# Altium PCB FPGA_Interface_BRD.PcbDoc (part 2 of 2)
Units mm, origin at the board's own origin, x right, y up, seen from the top; angles counter-clockwise.
Board outline 100 x 93 mm, 4 copper layers (L1, L2, L3, L4), stack 1.57 mm thick; 92 components, 85 nets, 379 pads, 103 vias.
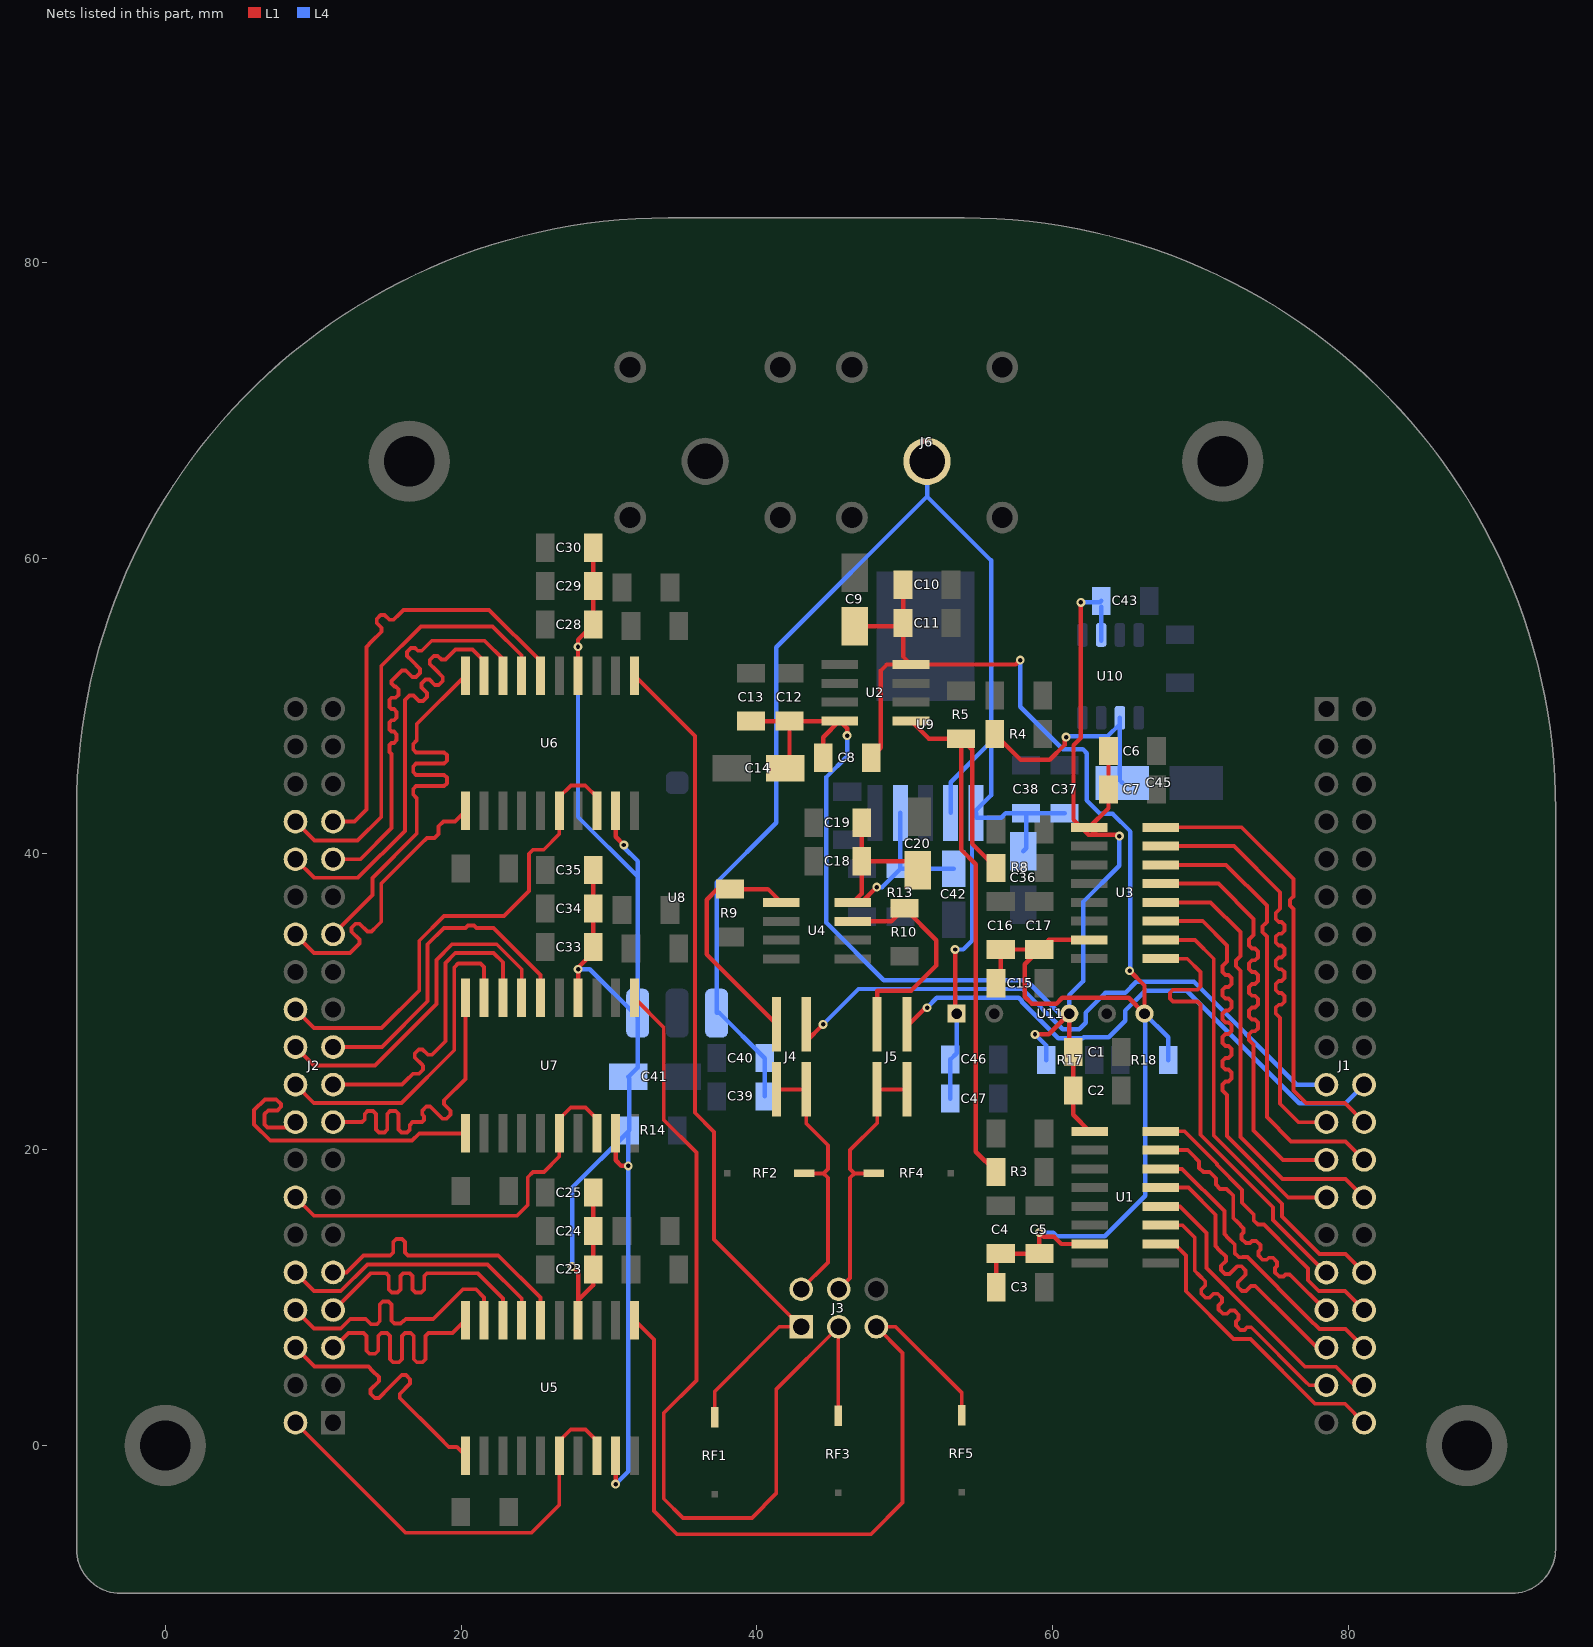
[diagram p4: the nets of this part, all layers, seen from the top]

## Via types
v1: diameter 0.6, hole 0.3, L1 to L4, 103 vias

## Nets (pads, with @x,y where several pads share a name; then routed paths per layer and width w, separated by ;. In a path a pad name is that pad's centre, name@x,y a point inside that pad or via, vN(x,y) a via of type N, cw(c..) or ccw(c..) an arc to the next point about the centre after c; other vN are vias at no path point) (continued)
o_DB1_DAC_2: J1.31 U3.9 | length 30.6
  L1 w0.262: U3.9@67.3,32.91 69.09,32.91 69.986,32.014 69.986,31.614 69.986,31.014 69.786,30.814 68.131,30.814 67.931,30.614 67.931,30.214 68.131,30.014 69.786,30.014 69.986,29.814 69.986,27 69.986,21.012 74.887,16.111 74.887,15.235 78.428,11.694 J1.31@78.504,11.694
o_DB2_ADC_1: J2.6 U5.1 | length 19
  L1 w0.262: J2.6@8.8,6.62 10.09,5.33 13.728,5.33 14.011,5.047 14.435,4.623 14.435,4.34 13.878,3.783 13.878,3.5 14.16,3.217 14.443,3.217 15.142,3.916 15.987,4.76 16.27,4.76 16.552,4.478 16.552,4.195 15.849,3.492 15.849,3.209 18.46,0.598 19.158,-0.1 19.707,-0.1 19.953,-0.347 U5.1@20.285,-0.678
o_DB2_ADC_2: J2.18 U7.1 | length 22.7
  L1 w0.262: J2.18@8.8,21.86 8.44,21.5 6.9,21.5 6.7,21.7 6.7,22.4 6.954,22.654 7.578,22.654 7.824,22.9 7.824,23.076 7.5,23.4 6.728,23.4 6,22.672 6,21.7 7.09,20.61 16.677,20.61 17.167,21.1 U7.1@20.285,21.1
o_DB2_ADC_3: J2.28 U6.1 | length 19.6
  L1 w0.262: J2.28@8.8,34.56 10.06,33.3 12.4,33.3 12.487,33.3 12.714,33.527 13.118,33.931 13.118,34.201 12.581,34.737 12.581,35.007 12.851,35.276 13.12,35.276 13.657,34.739 13.926,34.739 14.331,35.143 14.6,35.413 14.6,38 17,40.4 17.269,40.669 17.684,41.084 17.932,41.084 18.201,41.084 18.471,41.354 18.471,41.623 18.471,41.871 18.8,42.2 19.585,42.2 U6.1@20.285,42.9
o_DB2_DAC_1: J1.40 U1.10 | length 20.2
  L1 w0.262: U1.10@67.312,13.625 68.219,13.625 68.999,12.845 68.999,10.426 72.224,7.2 73.362,7.2 77.738,2.824 79.754,2.824 J1.40@81.044,1.534
o_DB2_DAC_2: J1.32 U3.10 | length 30.6
  L1 w0.262: U3.10@67.3,34.18 69.616,34.18 70.884,32.912 70.884,20.963 75.5,16.346 75.5,15.47 78.026,12.944 79.794,12.944 J1.32@81.044,11.694
o_DB3_ADC_1: J2.5 U5.20 | length 19
  L1 w0.262: J2.5@11.34,6.62 11.416,6.62 12.396,7.6 12.796,7.6 13.396,7.6 13.596,7.4 13.596,6.404 13.796,6.204 14.196,6.204 14.396,6.404 14.396,7.4 14.596,7.6 14.996,7.6 15.196,7.4 15.196,5.828 15.396,5.628 15.796,5.628 15.996,5.828 15.996,7.4 16.196,7.6 16.596,7.6 16.796,7.4 16.796,5.828 16.996,5.628 17.396,5.628 17.596,5.828 17.596,7.4 17.796,7.6 19.4,7.6 19.407,7.6 U5.20@20.285,8.478
o_DB3_ADC_2: J2.17 U7.20 | length 22.7
  L1 w0.262: J2.17@11.34,21.86 13.1,21.86 13.29,21.86 13.481,22.051 13.481,22.417 13.671,22.607 14.052,22.607 14.243,22.417 14.243,21.86 14.243,21.363 14.433,21.172 14.814,21.172 15.005,21.363 15.005,21.86 15.005,22.417 15.195,22.607 15.576,22.607 15.767,22.417 15.767,21.86 15.767,21.363 15.957,21.172 16.338,21.172 16.529,21.363 16.529,21.67 16.719,21.86 17.291,21.86 17.3,21.86 17.36,21.86 17.495,21.995 17.495,22.264 17.374,22.385 17.374,22.654 17.644,22.924 17.913,22.924 18.168,22.668 18.743,22.093 19.013,22.093 19.282,22.363 19.282,22.632 18.842,23.072 18.842,23.342 20.285,24.785 U7.20@20.285,30.257
o_DB3_ADC_3: J2.27 U6.20 | length 29.6
  L1 w0.262: J2.27@11.34,34.56 14,37.22 14,38.367 17,41.367 17,43.1 17,43.771 16.952,43.819 16.762,44.009 16.762,44.39 16.952,44.581 17,44.581 18.848,44.581 19.039,44.771 19.039,45.152 18.848,45.343 17,45.343 16.952,45.343 16.762,45.533 16.762,45.914 16.952,46.105 17,46.105 18.848,46.105 19.039,46.295 19.039,46.676 18.848,46.867 17,46.867 16.952,46.867 16.762,47.057 16.762,47.438 16.952,47.629 17,47.676 17,48.391 17,48.772 U6.20@20.285,52.057
o_DB3_DAC_1: J1.37 U1.11 | length 19.9
  L1 w0.262: U1.11@67.312,14.895 68.77,14.895 69.599,14.066 69.599,11.812 69.882,11.529 70.306,11.105 70.306,10.822 70.04,10.557 70.04,10.274 70.323,9.991 70.606,9.991 70.872,10.257 71.154,10.257 71.437,9.974 71.437,9.691 71.217,9.47 71.217,9.188 71.5,8.905 71.782,8.905 72.003,9.125 72.286,9.125 72.569,8.842 72.569,8.56 72.393,8.384 72.393,8.101 72.676,7.819 72.959,7.819 73.134,7.994 73.417,7.994 77.071,4.34 77.337,4.074 J1.37@78.504,4.074
o_DB3_DAC_2: J1.27 U3.11 | length 30.4
  L1 w0.262: U3.11@67.3,35.45 70.142,35.45 71.782,33.81 71.782,33.41 71.782,32.708 71.684,32.61 71.484,32.41 71.484,32.01 71.684,31.81 71.782,31.81 71.88,31.81 72.08,31.61 72.08,31.21 71.88,31.01 71.782,31.01 71.684,31.01 71.484,30.81 71.484,30.41 71.684,30.21 71.782,30.21 71.88,30.21 72.08,30.01 72.08,29.61 71.88,29.41 71.782,29.41 71.684,29.41 71.484,29.21 71.484,28.81 71.684,28.61 71.782,28.61 71.88,28.61 72.08,28.41 72.08,28.01 71.88,27.81 71.782,27.81 71.684,27.81 71.484,27.61 71.484,27.21 71.684,27.01 71.782,27.01 71.88,27.01 72.08,26.81 72.08,26.41 71.88,26.21 71.782,26.21 71.684,26.21 71.484,26.01 71.484,25.61 71.684,25.41 71.782,25.41 71.88,25.41 72.08,25.21 72.08,24.81 71.88,24.61 71.782,24.61 71.684,24.61 71.484,24.41 71.484,24.01 71.684,23.81 71.782,23.712 71.782,22.2 71.782,20.913 75.921,16.774 J1.27@78.504,16.774
o_DB4_ADC_1: J2.8 U5.19 | length 19
  L1 w0.262: J2.8@8.8,9.16 10.05,7.91 11.858,7.91 12.5,8.552 12.9,8.552 13.547,8.552 13.7,8.4 13.9,8.2 14.3,8.2 14.5,8.4 14.5,8.552 14.5,9.537 14.7,9.737 15.1,9.737 15.3,9.537 15.3,8.552 15.3,8.438 15.5,8.238 15.9,8.238 16.1,8.438 ; 16.1,8.4 16.253,8.552 18.116,8.552 20.129,10.565 21.005,10.565 21.555,10.015 U5.19@21.555,8.478 ; 16.1,8.415 16.1,8.423
o_DB4_ADC_2: J2.20 U7.19 | length 22.7
  L1 w0.262: J2.20@8.8,24.4 10.031,23.169 13.439,23.169 15.978,23.169 19.53,26.721 19.53,32.33 19.8,32.6 21.3,32.6 21.555,32.345 U7.19@21.555,30.257
o_DB4_ADC_3: J2.32 U6.19 | length 30.1
  L1 w0.262: J2.32@8.8,39.64 10.05,38.39 13.039,38.39 16.2,41.551 16.2,50.4 16.51,50.71 16.78,50.71 17.141,50.349 17.411,50.349 17.68,50.618 17.68,50.888 17.318,51.249 17.318,51.518 17.588,51.788 17.857,51.788 18.219,51.426 18.488,51.426 18.758,51.696 18.758,51.965 18.261,52.461 17.879,52.844 17.879,53.113 18.149,53.382 18.418,53.382 18.666,53.135 18.935,53.135 19.339,53.539 19.608,53.808 20.776,53.808 21.555,53.03 U6.19@21.555,52.057
o_DB4_DAC_1: J1.38 U1.12 | length 20.1
  L1 w0.262: U1.12@67.312,16.165 68.59,16.165 70.4,14.355 70.4,11.991 71.81,10.581 ; 71.799,10.57 77.046,5.324 79.159,5.324 80.409,4.074 J1.38@81.044,4.074
o_DB4_DAC_2: J1.28 U3.12 | length 30.4
  L1 w0.262: U3.12@67.3,36.72 70.668,36.72 72.68,34.708 72.68,34.3 72.68,33.098 72.582,33 72.382,32.8 72.382,32.4 72.582,32.2 72.68,32.102 72.68,31.8 72.68,20.864 75.519,18.024 79.794,18.024 J1.28@81.044,16.774
o_DB5_ADC_1: J2.7 U5.18 | length 19
  L1 w0.262: J2.7@11.34,9.16 11.416,9.16 13.906,11.65 14.306,11.65 14.906,11.65 15.106,11.45 15.106,10.538 15.306,10.338 15.706,10.338 15.906,10.538 15.906,11.45 16.106,11.65 16.506,11.65 16.706,11.45 16.706,10.538 16.906,10.338 17.306,10.338 17.506,10.538 17.506,11.45 17.706,11.65 21.105,11.65 22.825,9.93 U5.18@22.825,8.478
o_DB5_ADC_2: J2.19 U7.18 | length 22.7
  L1 w0.262: J2.19@11.34,24.4 16,24.4 16.269,24.669 16.736,25.136 16.881,25.136 17.15,25.136 17.42,25.405 17.42,25.675 17.347,25.747 16.861,26.233 16.861,26.503 17.13,26.772 17.4,26.772 17.751,26.421 18.021,26.421 18.55,26.95 18.93,27.33 18.93,32.63 19.6,33.3 22.2,33.3 22.825,32.675 U7.18@22.825,30.257
o_DB5_ADC_3: J2.31 U6.18 | length 29.5
  L1 w0.262: J2.31@11.34,39.64 13.192,39.64 15.3,41.749 15.3,45.7 15.3,46.747 15.162,46.885 15.162,47.371 15.3,47.509 15.448,47.509 15.638,47.7 15.638,48.081 15.448,48.271 15.3,48.271 15.162,48.409 15.162,48.895 15.3,49.033 15.448,49.033 15.638,49.224 15.638,49.605 15.448,49.795 15.3,49.795 15.162,49.933 15.162,50.419 15.3,50.557 15.568,50.557 15.758,50.748 15.758,51.129 15.568,51.319 15.49,51.319 15.3,51.51 15.3,51.7 15.35,51.75 15.584,51.984 15.988,52.388 16.257,52.388 16.691,51.955 16.96,51.955 17.229,52.224 17.229,52.493 16.661,53.061 16.343,53.379 16.343,53.649 16.613,53.918 16.882,53.918 17.066,53.735 17.335,53.735 17.739,54.139 18.008,54.408 21.592,54.408 22.825,53.175 U6.18@22.825,52.057
o_DB5_DAC_1: J1.35 U1.13 | length 20
  L1 w0.262: U1.13@67.312,17.435 69.165,17.435 71,15.6 71,13.476 71.283,13.193 71.707,12.769 71.707,12.486 71.372,12.151 71.372,11.868 71.654,11.585 71.937,11.585 72.414,12.062 72.473,12.121 72.756,12.121 73.039,11.838 73.039,11.555 72.98,11.496 72.503,11.019 72.503,10.736 72.786,10.454 73.069,10.454 73.404,10.789 73.687,10.789 76,8.476 77.862,6.614 J1.35@78.504,6.614
o_DB5_DAC_2: J1.25 U3.13 | length 30.5
  L1 w0.262: U3.13@67.3,37.99 71.194,37.99 73.578,35.606 73.578,35.206 73.578,34.504 73.48,34.406 73.28,34.206 73.28,33.806 73.48,33.606 73.578,33.606 73.676,33.606 73.876,33.406 73.876,33.006 73.676,32.806 73.578,32.806 73.471,32.806 73.271,32.606 73.271,32.206 73.471,32.006 73.578,32.006 73.676,32.006 73.876,31.806 73.876,31.406 73.676,31.206 73.578,31.206 73.48,31.206 73.28,31.006 73.28,30.606 73.48,30.406 73.578,30.406 73.676,30.406 73.876,30.206 73.876,29.806 73.676,29.606 73.578,29.606 73.48,29.606 73.28,29.406 73.28,29.006 73.48,28.806 73.578,28.806 73.676,28.806 73.876,28.606 73.876,28.206 73.676,28.006 73.578,28.006 73.48,28.006 73.28,27.806 73.28,27.406 73.48,27.206 73.578,27.108 73.578,26.2 73.578,21.309 75.573,19.314 J1.25@78.504,19.314
o_DB6_ADC_1: J2.10 U5.17 | length 19
  L1 w0.262: J2.10@8.8,11.7 10.05,10.45 11.858,10.45 13.658,12.25 21.775,12.25 24.095,9.93 U5.17@24.095,8.478
o_DB6_ADC_2: J2.22 U7.17 | length 23.6
  L1 w0.262: J2.22@8.8,26.94 10.05,25.69 14.182,25.69 18.33,29.838 18.33,32.832 19.388,33.89 22.405,33.89 24.095,32.2 U7.17@24.095,30.257
o_DB6_ADC_3: J2.34 U6.17 | length 30
  L1 w0.262: J2.34@8.8,42.18 10.08,40.9 13,40.9 14.6,42.5 14.6,52.7 17.279,55.379 22.121,55.379 24.095,53.405 U6.17@24.095,52.057
o_DB6_DAC_1: J1.36 U1.14 | length 20
  L1 w0.262: U1.14@67.312,18.705 68.744,18.705 71.6,15.849 71.6,14.29 71.883,14.008 72.307,13.583 72.307,13.3 72.3,13.293 72.3,13.01 72.582,12.727 72.865,12.727 72.873,12.735 73.156,12.735 77.3,8.59 78.026,7.864 79.794,7.864 J1.36@81.044,6.614
o_DB6_DAC_2: J1.26 U3.14 | length 30.6
  L1 w0.262: U3.14@67.3,39.26 71.72,39.26 74.476,36.504 74.476,36.104 74.476,35.402 74.378,35.304 74.178,35.104 74.178,34.704 74.378,34.504 74.476,34.406 74.476,34.1 74.476,22.207 76.119,20.564 79.794,20.564 J1.26@81.044,19.314
o_DB7_ADC_1: J2.9 U5.16 | length 19
  L1 w0.262: J2.9@11.34,11.7 12.259,11.7 13.409,12.85 13.809,12.85 14.609,12.85 15.209,12.85 15.409,13.05 15.409,13.769 15.609,13.969 16.009,13.969 16.209,13.769 16.209,13.05 16.409,12.85 17.2,12.85 22.51,12.85 25.365,9.995 U5.16@25.365,8.478
o_DB7_ADC_2: J2.21 U7.16 | length 22.6
  L1 w0.262: J2.21@11.34,26.94 14.637,26.94 17.73,30.033 17.73,33.89 18.84,35 19.1,35 20.282,35 20.451,35.169 20.875,35.169 21.044,35 21.806,35 22.187,35 25.365,31.822 U7.16@25.365,30.257
o_DB7_ADC_3: J2.33 U6.16 | length 30.1
  L1 w0.262: J2.33@11.34,42.18 12.78,42.18 13.6,43 13.6,54 13.95,54.35 14.618,55.018 14.618,55.288 14.29,55.615 14.29,55.885 14.56,56.154 14.829,56.154 15.157,55.826 15.426,55.826 15.831,56.231 16.1,56.5 21.895,56.5 25.365,53.03 U6.16@25.365,52.057
o_DB7_DAC_1: J1.33 U1.15 | length 19.2
  L1 w0.262: U1.15@67.312,19.975 69.125,19.975 69.408,19.692 69.898,19.202 69.898,19.051 69.898,18.768 70.181,18.485 70.464,18.485 70.615,18.485 71.029,18.071 71.029,17.919 71.029,17.637 71.312,17.354 71.595,17.354 71.746,17.354 72.2,16.9 72.2,15.382 72.483,15.099 72.907,14.675 72.907,14.392 72.768,14.253 72.768,13.97 73.051,13.688 73.334,13.688 73.473,13.826 73.756,13.826 74.038,13.543 74.038,13.261 73.9,13.122 73.9,12.839 74.183,12.556 74.465,12.556 74.604,12.695 74.887,12.695 75.17,12.412 75.17,12.129 75.031,11.99 75.031,11.708 75.314,11.425 75.597,11.425 75.736,11.563 76.018,11.563 76.209,11.373 78.428,9.154 J1.33@78.504,9.154
o_DB7_DAC_2: J1.23 U3.15 | length 30.5
  L1 w0.262: U3.15@67.3,40.53 72.246,40.53 75.374,37.402 75.374,37.002 75.374,36.3 75.276,36.202 75.076,36.002 75.076,35.602 75.276,35.402 75.374,35.402 75.472,35.402 75.672,35.202 75.672,34.802 75.472,34.602 75.374,34.602 75.276,34.602 75.076,34.402 75.076,34.002 75.276,33.802 75.374,33.802 75.472,33.802 75.672,33.602 75.672,33.202 75.472,33.002 75.374,33.002 75.276,33.002 75.076,32.802 75.076,32.402 75.276,32.202 75.374,32.202 75.472,32.202 75.672,32.002 75.672,31.602 75.472,31.402 75.374,31.402 75.276,31.402 75.076,31.202 75.076,30.802 75.276,30.602 75.374,30.602 75.472,30.602 75.672,30.402 75.672,30.002 75.472,29.802 75.374,29.802 75.276,29.802 75.076,29.602 75.076,29.202 75.276,29.002 75.374,28.904 75.374,28.1 75.374,23.105 76.625,21.854 J1.23@78.504,21.854
o_DB8_DAC_1: J1.34 U1.16 | length 20
  L1 w0.262: U1.16@67.312,21.245 68.904,21.245 71.097,19.052 71.097,18.983 72.8,17.28 72.8,16.409 73.083,16.126 73.591,15.618 73.591,15.504 73.591,15.221 73.874,14.938 74.157,14.938 74.271,14.938 76.309,12.9 77.254,11.955 77.254,11.176 77.986,10.444 79.754,10.444 J1.34@81.044,9.154
o_DB8_DAC_2: J1.24 U3.16 | length 30.6
  L1 w0.262: U3.16@67.3,41.8 72.772,41.8 76.272,38.3 76.272,37.9 76.272,37.122 76.25,37.1 76.05,36.9 76.05,36.5 76.25,36.3 76.272,36.278 76.272,35.8 76.272,24.003 77.131,23.144 79.754,23.144 J1.24@81.044,21.854
o_EOC_ADC_1: J2.2 U5.6 U5.8 | length 30.2
  L1 w0.262: J2.2@8.8,1.54 16.242,-5.902 24.748,-5.902 26.635,-4.015 U5.6@26.635,-0.678 26.635,0.295 27.414,1.073 28.396,1.073 29.175,0.295 U5.8@29.175,-0.678
o_EOC_ADC_2: J2.14 U7.6 U7.8 | length 27.8
  L1 w0.262: J2.14@8.8,16.78 10.05,15.53 23.77,15.53 24.5,16.26 24.5,18.14 24.862,18.502 25.602,18.502 26.635,19.535 U7.6@26.635,21.1 26.635,22.073 27.414,22.852 28.396,22.852 29.175,22.073 U7.8@29.175,21.1
o_EOC_ADC_3: J2.24 U6.6 U6.8 | length 33.9
  L1 w0.262: J2.24@8.8,29.48 10.05,28.23 14.626,28.23 17.168,30.772 17.168,34.123 18.845,35.8 22.9,35.8 24.598,37.498 24.598,40.011 24.87,40.283 25.583,40.283 26.635,41.335 U6.6@26.635,42.9 26.635,43.846 27.422,44.633 28.388,44.633 29.175,43.846 U6.8@29.175,42.9
V_DAC_ref: R3.1 R5.2 R8.1 U2.1 | length 43.9
  L1 w0.3: U2.1@50.412,48.995 51.628,47.779 R5.2@53.8,47.779 ; R3.1@56.161,18.5 54.8,19.861 54.8,39.3 53.8,40.3 R5.2@53.8,47.779 ; R8.1@56.167,39.055 54.544,40.678 54.544,47.035 R5.2@53.8,47.779
"VCC (+2,5 V)(30 mA)": C45.1 R4.1 U10.6 | length 14.9
  L1 w0.3: R4.1@56.079,48.1 57.821,46.357 59.797,46.357 60.8,47.36 60.8,47.8 v1(60.9,47.9)
  L4 w0.3: v1(60.9,47.9) 60.95,47.95 63.707,47.95 U10.6@64.54,48.783 ; U10.6@64.54,49.2 U10.6@64.54,48.783 ; C45.1@64.7,44.8 64.54,44.96 U10.6@64.54,48.783
"VCC (+3.3 V)(3 A)": C23.1 C24.1 C25.1 C28.1 C29.1 C30.1 C33.1 C34.1 C35.1 C41.1 R14.1 U5.9 U5.14 U6.9 U6.14 U7.9 U7.14 U8.3 | length 114.5
  L1 w0.3: v1(27.5,12.1) 27.905,11.695 27.905,9.82 ; U5.14@27.905,8.478 27.905,9.82 ; U7.14@27.905,30.257 27.9,30.262 27.905,30.267 v1(27.905,32.2) 27.905,32.305 28.921,33.321 C33.1@28.921,33.7 28.921,34.4 C34.1@28.921,36.3 C35.1@28.921,38.9 ; U6.14@27.905,52.057 27.9,52.062 v1(27.9,54) 27.9,54.479 C28.1@28.921,55.5 C29.1@28.921,58.1 C30.1@28.921,60.7 ; C25.1@28.921,17.1 C24.1@28.921,14.5 C23.1@28.921,11.9 28.921,10.836 27.905,9.82 ; v1(30.445,-2.61) U5.9@30.445,-0.678 ; U7.9@30.445,21.1 30.445,19.281 30.826,18.9 v1(31.3,18.9) ; U6.9@30.445,42.9 30.445,41.155 v1(31,40.6)
  L4 w0.3: v1(27.5,12.1) 27.5,17.421 R14.1@31.3,21.221 ; v1(27.9,54) 27.9,42.5 31.933,38.467 ; v1(27.905,32.2) 28.7,32.2 U8.3@31.933,28.967 ; v1(30.445,-2.61) 31.3,-1.755 v1(31.3,18.9) R14.1@31.3,21.221 ; v1(31,40.6) 31,40.445 31.933,39.512 31.933,38.467 ; R14.1@31.3,21.221 R14.1@31.379,21.3 31.379,24.841 C41.1@31.3,24.92 31.933,25.553 U8.3@31.933,28.967 ; U8.3@31.933,28.967 31.933,38.467
"VCC (+5 V)(100 mA)": C1.1 C2.1 C6.1 C7.1 C8.2 C12.1 C13.1 C14.1 C43.1 R17.1 U1.1 U2.8 U3.1 U10.2 U11.3 | length 102.2
  L1 w0.3: C13.1@39.6,48.979 C12.1@42.2,48.979 ; C14.1@41.9,45.8 42.2,46.1 C12.1@42.2,48.979 ; C8.2@44.079,45.8 C8.2@44.479,46.2 ; C8.2@44.479,46.5 44.479,47.886 U2.8@45.588,48.995 46.1,48.483 v1(46.1,48) ; U2.8@45.458,48.979 C12.1@42.2,48.979 ; v1(58.8,27.8) 59.72,27.8 U11.3@61.12,29.2 ; U11.3@61.1,28.957 61.1,26.879 C1.1@61.379,26.6 C2.1@61.379,24 61.379,22.354 U1.1@62.488,21.245 ; v1(61.9,57) 61.9,47.839 61.4,47.339 61.4,42.3 62.416,41.284 62.992,41.284 ; C6.1@63.767,46.955 C7.1@63.767,44.355 63.767,43.091 U3.1@62.476,41.8 62.992,41.284 ; v1(64.5,41.2) 64.416,41.284 62.992,41.284
  L4 w0.3: v1(46.1,48) 46.1,46.6 44.698,45.198 44.698,35.336 48.57,31.464 58.2,31.464 60.464,29.2 U11.3@61.1,29.2 ; v1(58.8,27.8) 59.558,27.042 R17.1@59.558,26.057 ; v1(61.9,57) 63.179,57 C43.1@63.279,57.1 ; U10.2@63.27,54.4 63.279,54.409 C43.1@63.279,56.7 ; v1(64.5,41.2) 64.5,39.2 62.05,36.75 62.05,31.389 61.1,30.439 U11.3@61.1,29.2 ; U11.3@60.905,28.985 U11.3@61.12,29.2 U11.3@61.1,29.2 ; U11.3@60.905,28.985 60.792,28.872 60.679,28.985 U11.3@60.905,28.985
"VCC (+10,5 V)(1,5 A)": C18.1 C19.1 C20.1 C42.1 R13.1 U4.8 U9.4 | length 21.2
  L1 w0.3: C19.1@47.089,42.1 C18.1@47.089,39.5 ; v1(48.1,37.754) 47.051,36.705 U4.8@46.48,36.705 47.089,37.314 C18.1@47.089,39.5 ; C20.1@50.868,38.9 50.268,39.5 C18.1@47.089,39.5
  L4 w0.3: v1(48.1,37.754) 48.462,37.754 R13.1@49.7,38.993 ; U9.4@49.698,42.766 49.7,42.764 R13.1@49.7,38.993 ; C42.1@53.3,38.996 49.704,38.996 R13.1@49.7,38.993
"VCC (+12 V)": C36.1 C37.1 C38.1 C39.1 C40.1 C46.1 C47.1 J6.1 U8.1 U9.1 U9.2 U11.1 | length 109.4
  L1 w0.3: v1(53.4,33.534) 53.4,29.3 U11.1@53.5,29.2
  L4 w0.3: C39.1@40.521,23.6 C40.1@40.521,26.19 37.464,29.247 37.267,29.247 37.267,38.067 41.3,42.1 41.3,53.967 51.5,64.167 ; J6.1@51.5,66.54 51.5,64.167 ; C47.1@53.079,23.457 C46.1@53.079,26.102 53.5,26.523 U11.1@53.5,29.2 ; U9.2@53.102,42.766 53.102,44.85 55.827,47.575 ; v1(53.4,33.534) 53.944,33.534 54.54,34.13 54.54,42.503 U9.1@54.804,42.766 ; 55.839,47.587 55.827,47.575 ; C36.1@58,40.171 58.2,40.371 C38.1@58.2,42.75 ; C37.1@60.8,42.75 C38.1@58.2,42.75 ; 51.5,64.167 55.827,59.84 55.827,47.575 ; U9.1@54.804,42.766 54.804,42.942 55.827,43.965 55.827,47.575 ; U9.1@54.804,42.766 54.82,42.75 54.82,42.45 56.511,42.45 56.811,42.75 C38.1@58.2,42.75
"VCC (-5 V)(100 mA)": C3.2 C4.1 C5.1 C8.1 C9.1 C10.1 C11.1 C15.2 C16.1 C17.1 R18.2 U1.7 U2.4 U3.7 U11.5 | length 109.2
  L1 w0.3: C9.1@46.6,55.4 49.679,55.4 C11.1@49.879,55.6 ; C8.1@47.721,46.5 48.382,47.161 48.382,52.4 48.787,52.805 U2.4@50.412,52.805 ; C10.1@49.879,58.2 C11.1@49.879,55.6 ; C15.2@56.167,31.255 56.488,31.576 C16.1@56.488,33.534 C17.1@59.088,33.534 ; C3.2@56.179,10.7 56.179,12.67 C4.1@56.488,12.979 C5.1@59.1,12.979 59.088,12.991 v1(59.088,14.4) 59.388,14.1 60.1,14.1 60.575,13.625 U1.7@62.488,13.625 ; v1(57.8,53.1) 57.505,52.805 U2.4@50.412,52.805 ; U3.7@62.476,34.18 59.734,34.18 C17.1@59.088,33.534 ; v1(65.2,32.1) 66.2,31.1 U11.5@66.2,29.2 65.136,30.264 60.637,30.264 60.226,29.853 58.592,29.853 58.1,30.345 58.1,32.546 C17.1@59.088,33.534 ; C11.1@49.879,55.6 49.879,53.338 U2.4@50.412,52.805
  L4 w0.3: v1(57.8,53.1) 57.8,49.939 60.666,47.073 62.039,47.073 62.3,46.812 62.3,43.614 63.214,42.7 64.061,42.7 65.25,41.511 65.25,32.15 v1(65.2,32.1) ; v1(59.088,14.4) 60.039,14.4 60.289,14.15 63.511,14.15 66.25,16.889 66.25,28.887 U11.5@66.18,28.957 ; U11.5@66.2,29.2 67.8,27.6 R18.2@67.8,26.057
Vin(ADC-1): J3.5 RF5.1 U5.11 | length 53.6
  L1 w0.262: U5.11@31.715,8.478 33.031,7.162 33.031,-4.431 34.6,-6 47.7,-6 49.838,-3.862 49.838,6.257 J3.5@48.07,8.025 49.375,8.025 53.85,3.55 RF5.1@53.85,2.037
Vin(ADC-2): J3.3 RF3.1 U7.11 | length 63.9
  L1 w0.262: U7.11@31.715,30.257 33.7,28.272 33.7,22 35.9,19.8 35.9,4.4 33.7,2.2 33.7,-3.6 35,-4.9 39.656,-4.9 41.3,-3.256 41.3,3.795 J3.3@45.53,8.025 ; RF3.1@45.5,2.4 J3.3@45.5,7.9
Vin(ADC-3): J3.1 RF1.1 U6.11 | length 58.1
  L1 w0.262: U6.11@31.715,52.057 35.802,47.97 35.802,22.5 37.1,21.202 37.1,13.915 J3.1@42.99,8.025 41.509,8.025 37.15,3.666 RF1.1@37.15,1.906
"Vo (A1)": J3.2 J4.2 J4.4 RF2.1 | length 18.4
  L1 w0.262: J4.4@41.332,24.074 J4.2@43.332,24.074 43.332,21.768 44.8,20.3 44.8,18.7 44.5,18.4 ; J3.2@42.99,10.565 44.8,12.375 44.8,18.1 44.5,18.4 ; RF2.1@43.2,18.4 44.5,18.4
"Vo (A2)": J3.4 J5.2 J5.4 RF4.1 | length 18.3
  L1 w0.262: J3.4@45.53,10.565 46.3,11.335 46.3,18.1 46.6,18.4 ; RF4.1@47.75,18.4 RF4.1@47.9,18.4 46.6,18.4 ; J5.2@50.132,24.074 J5.4@48.132,24.074 48.132,21.807 46.3,19.975 46.3,18.7 46.6,18.4
"Vo (D-1)": J1.21 J4.1 | length 42.4
  L1 w0.3: J4.1@43.3,27.3 v1(44.469,28.469)
  L4 w0.3: v1(44.469,28.469) 46.864,30.864 57.951,30.864 60.679,28.136 61.784,28.136 62.225,28.577 62.225,29.269 63.555,30.6 64.9,30.6 65.65,31.35 69.548,31.35 76.504,24.394 J1.21@78.504,24.394
"Vo (D-2)": J1.22 J5.1 | length 38.2
  L1 w0.3: J5.1@50.132,28.469 50.269,28.469 51.4,29.6 v1(51.5,29.6)
  L4 w0.3: v1(51.5,29.6) 52.164,30.264 57.703,30.264 57.9,30.067 57.9,30 60.364,27.536 62.033,27.536 62.097,27.6 63.788,27.6 64.9,28.712 64.9,29.405 66.245,30.75 69.05,30.75 76.656,23.144 79.794,23.144 J1.22@81.044,24.394
"Vo (DAC-1)": J4.3 R9.2 U4.1 | length 16.1
  L1 w0.3: J4.3@41.332,28.469 36.6,33.201 36.6,36.9 37.321,37.621 R9.2@38.168,37.621 40.74,37.621 U4.1@41.656,36.705
"Vo (DAC-2)": J5.3 R10.2 U4.7 | length 15.6
  L1 w0.3: U4.7@46.48,35.435 49.082,35.435 R10.2@49.968,36.321 52.12,34.169 52.12,32.454 50.426,30.76 48.134,30.76 J5.3@48.132,28.469 J5.3@48.132,28.469
pads on no net: J1.1 J1.2 J1.3 J1.4 J1.5 J1.6 J1.7 J1.8 J1.9 J1.10 J1.11 J1.13 J1.14 J1.15 J1.16 J1.17 J1.18 J1.19 J1.20 J1.29 J2.11 J2.29 J2.35 J2.36 J2.37 J2.38 J2.39 J2.40 J6.2 J6.3 J6.4 J6.5 J7.2 J7.3 J7.4 J7.5 MH1.1 MH2.1 MH3.1 MH4.1 U2.5 U2.6 U2.7 U5.10 U6.10 U7.10 U10.1 U10.5 U10.7 U10.8
copper on no net: | length 36.2
  L1 w0.3: 3.908,58.5 5.408,58.5 ; 4.158,58 5.158,58 ; 4.408,57.5 4.908,57.5 ; 4.658,58.5 4.658,59.1 4.258,59.5 4.958,60.2 4.258,60.9 4.958,61.6 4.558,62 4.558,62.8 ; 5.258,64.7 4.558,64.7 4.558,62.8 ; 5.258,66.2 4.458,66.2 ; 5.508,64.7 6.008,64.7 ; 5.508,66.2 6.008,66.2 ; 5.758,65.95 5.758,66.45 ; 8.858,65.45 8.858,62.9 8.258,62.9 7.858,62.5 7.158,63.2 6.458,62.5 5.758,63.2 5.358,62.8 4.558,62.8 ; 9.358,65.45 7.208,65.45 ; 4.458,66.2 ccw(c4.208,66.2) 4.458,66.2 ; 7.208,65.45 5.258,67.4 5.258,63.5 7.208,65.45 ; 9.908,65.45 ccw(c9.658,65.45) 9.908,65.45

## Polygon pours and split planes (outlines as drawn)
"VCC (+12 V)" on L1 "L1-VCC (+12 V)" (solid, pour order 20): 52.9,34 53,33.9 54.4,33.9 54.4,28.606 54,28.206 52.694,28.206 52.3,28.6 52.5,28.8 52.5,33.9 53.2,33.9
"VCC (+10,5 V)(1,5 A)" on L1 "L1-VCC (+10,5 V)(1,5 A)" (solid, pour order 8): 45.1,36.2 47.9,36.2 47.9,36.766 48.634,37.5 48.734,37.4 51.7,37.4 52,37.7 52,40.6 49.57,40.6 49.5,40.53 48.132,41.898 48.132,43 48.103,43 48,43.103 47.988,43.091 46.291,43.091 45.458,42.258 45.458,37.658 44.9,37.1 44.9,36.2
"VCC (+5 V)(100 mA)" on L1 "L1-VCC (+5 V)(100 mA)" (solid, pour order 6): 64.6,42.384 65,41.984 65,40.8 64,40.8 63.704,41.096 63.704,41.284 61.167,41.284 60.951,41.5 61.089,41.638 61.089,47.028 62.109,48.048 64.752,48.048 64.8,48 64.6,47.8
"VCC (-5 V)(100 mA)" on L1 "L1-VCC (-5 V)(100 mA)" (solid, pour order 4): 55.3,14.4 55.41,14.29 61.11,14.29 61.334,14.066 63.8,14.066 63.8,13.1 63.71,13.01 60.859,13.01 60,12.151 59.951,12.2 55.3,12.2
"VCC (+5 V)(100 mA)" on L1 "L1-VCC (+5 V)(100 mA) 1" (solid, pour order 2): 59.9,29.3 62.055,29.3 62.2,29.155 62.2,23.292 64,21.492 64,20.9 61.012,20.9 60.4,21.512 60.4,28.5 59.9,29
"VCC (+5 V)(100 mA)" on L1 "L1-VCC (+5 V)(100 mA) 2" (solid, pour order 0): 38.5,49.794 38.506,49.8 44,49.8 44.4,49.4 46.996,49.4 46.996,48.596 45.7,47.3 45.7,45.7 44.581,44.581 40.5,44.581 40.5,44.613 40.1,45.013 40.1,46.885 40.015,46.885 38.3,48.6 38.3,49.8
"VCC (+12 V)" on L4 "L4-VCC (+12 V)" (solid, pour order 18): 50.8,61.1 53.6,61.1 55.35,59.35 55.35,48.25 52.5,45.4 52.5,40.756 52.656,40.6 54,40.6 54.4,40.2 54.4,34.254 54.046,33.9 52.84,33.9 52.84,32.46 52.9,32.4 54.8,32.4 54.8,32.7 55.7,33.6 55.7,43.9 56.321,44.521 56.321,62.579 54.3,64.6
GND on L4 "L4-GND" (solid, pour order 16): 31.8,-3.7 31.8,18.356 32.9,19.456 32.9,28.544 33.956,29.6 35.574,29.6 35.8,29.374 35.8,26.6 36.09,26.6 36.5,26.19 36.5,3.5 34,1 34,-3.7
"VCC (+3.3 V)(3 A)" on L4 "L4-VCC (+3.3 V)(3 A)" (solid, pour order 14): 31.6,-3.1 31.6,19 32.7,20.1 32.7,32.2 32.6,32.3 32.6,40.5 32.5,40.5 30.8,42.2 29,42.2 29,46.4 28.8,46.6 28.8,54.7 28.1,54.7 27.2,53.8 27.2,32.9 27.5,32.6 27.5,29.695 27.5,-3.1
GND on L4 "L4-GND 1" (solid, pour order 12): 33.5,28.356 33.756,28.1 35.4,28.1 35.6,28.3 35.6,39.5 33.588,39.5 33.5,39.412
"VCC (+12 V)" on L4 "L4-VCC (+12 V) 1" (solid, pour order 10): 54.3,68.8 54.3,64.6 50.8,61.1 49.4,61.1 43.6,55.3 43.6,36.8 41.2,34.4 42.4,33.2 42.4,22.1 41.9,21.6 39.4,21.6 39.4,26.2 37.9,27.7 36.4,27.7 36.1,28 36.1,38.221 40.6,42.721 40.6,53.7 48.9,62 48.9,68.8
GND on L2 (split plane): 54.979,82.898 56.936,82.802 58.885,82.61 60.823,82.322 62.744,81.94 64.645,81.464 66.519,80.896 68.363,80.236 70.173,79.486 71.944,78.649 73.672,77.725 75.352,76.718 76.981,75.63 78.554,74.463 80.068,73.22 81.52,71.905 82.905,70.52 84.22,69.068 85.463,67.554 86.63,65.981 87.718,64.352 88.725,62.672 89.649,60.944 90.486,59.173 91.236,57.363 91.896,55.519 92.464,53.644 92.94,51.744 93.322,49.823 93.61,47.885 93.802,45.936 93.898,43.979 93.898,43 93.898,-7 93.898,-7.19 93.848,-7.567 93.75,-7.934 93.605,-8.285 93.415,-8.614 93.184,-8.915 92.915,-9.184 92.614,-9.415 92.285,-9.605 91.934,-9.75 91.567,-9.848 91.19,-9.898 91,-9.898 -3,-9.898 -3.19,-9.898 -3.567,-9.848 -3.934,-9.75 -4.285,-9.605 -4.614,-9.415 -4.915,-9.184 -5.184,-8.915 -5.415,-8.614 -5.605,-8.285 -5.75,-7.934 -5.848,-7.567 -5.898,-7.19 -5.898,-7 -5.898,43 -5.898,43.979 -5.802,45.936 -5.61,47.885 -5.322,49.823 -4.94,51.744 -4.464,53.645 -3.896,55.519 -3.236,57.363 -2.486,59.173 -1.649,60.944 -0.725,62.672 0.282,64.352 1.37,65.981 2.537,67.554 3.78,69.068 5.095,70.52 6.48,71.905 7.932,73.22 9.446,74.463 11.019,75.63 12.648,76.718 14.328,77.725 16.056,78.649 17.827,79.486 19.637,80.236 21.481,80.896 23.355,81.464 25.256,81.94 27.177,82.322 29.115,82.61 31.064,82.802 33.021,82.898 34,82.898 54,82.898
GND on L3 (split plane): 54.979,82.898 56.936,82.802 58.885,82.61 60.823,82.322 62.744,81.94 64.645,81.464 66.519,80.896 68.363,80.236 70.173,79.486 71.944,78.649 73.672,77.725 75.352,76.718 76.981,75.63 78.554,74.463 80.068,73.22 81.52,71.905 82.905,70.52 84.22,69.068 85.463,67.554 86.63,65.981 87.718,64.352 88.725,62.672 89.649,60.944 90.486,59.173 91.236,57.363 91.896,55.519 92.464,53.644 92.94,51.744 93.322,49.823 93.61,47.885 93.802,45.936 93.898,43.979 93.898,43 93.898,-7 93.898,-7.19 93.848,-7.567 93.75,-7.934 93.605,-8.285 93.415,-8.614 93.184,-8.915 92.915,-9.184 92.614,-9.415 92.285,-9.605 91.934,-9.75 91.567,-9.848 91.19,-9.898 91,-9.898 -3,-9.898 -3.19,-9.898 -3.567,-9.848 -3.934,-9.75 -4.285,-9.605 -4.614,-9.415 -4.915,-9.184 -5.184,-8.915 -5.415,-8.614 -5.605,-8.285 -5.75,-7.934 -5.848,-7.567 -5.898,-7.19 -5.898,-7 -5.898,43 -5.898,43.979 -5.802,45.936 -5.61,47.885 -5.322,49.823 -4.94,51.744 -4.464,53.645 -3.896,55.519 -3.236,57.363 -2.486,59.173 -1.649,60.944 -0.725,62.672 0.282,64.352 1.37,65.981 2.537,67.554 3.78,69.068 5.095,70.52 6.48,71.905 7.932,73.22 9.446,74.463 11.019,75.63 12.648,76.718 14.328,77.725 16.056,78.649 17.827,79.486 19.637,80.236 21.481,80.896 23.355,81.464 25.256,81.94 27.177,82.322 29.115,82.61 31.064,82.802 33.021,82.898 34,82.898 54,82.898

## Other copper
L1:
  text "Rf" at 7.058,63.6 h0.75
  text "Rg" at 2.558,61.3 h0.75
  text "I only give / Negative Feedback" at 5.658,59 h0.75
L4:
  pour cut-out: 34.077,10.894 35.333,10.894 35.333,9.694 34.077,9.694
L2 (plane layer: these items are gaps in the copper):
  pour cut-out: 31.6,-2.71 33,-2.71 33,-4.01 31.6,-4.01
  pour cut-out: 32.3,19.35 33.7,19.35 33.7,18.05 32.3,18.05
  pour cut-out: 33.4,39.05 34.8,39.05 34.8,37.75 33.4,37.75
L3 (plane layer: these items are gaps in the copper):
  pour cut-out: 31.6,-2.7 33,-2.7 33,-4 31.6,-4
  pour cut-out: 32.3,19.354 33.7,19.354 33.7,18.054 32.3,18.054
  pour cut-out: 33.4,39.054 34.8,39.054 34.8,37.754 33.4,37.754

## Silkscreen, mask and mechanical layers (free items; w line width, h text height)
Top Overlay:
  lines w0.3: 27.45,67 28.95,67 ; 27.7,66.5 28.7,66.5 ; 27.95,66 28.45,66 ; 28.2,67 28.2,67.6
  text "+12 V" at 59.2,66.5 h1.52
  text "Analog Inputs = [0 ; 2] V / Analog Outputs = [0 ; 10] V / Digital Signals = [0 ; 3,3] V" at 4.4,8.5 h1.52 r90
  text "v3.0" at 58.5,-3.4 h1.52
  text "ADC&DAC Board Interface" at 58.5,-6.5 h1.52
Top Solder:
  circle w0.3: c4.2,66.2 r0.25
  circle w0.3: c9.65,65.45 r0.25
  lines w0.3: 3.9,58.5 5.4,58.5 ; 4.15,58 5.15,58 ; 4.4,57.5 4.9,57.5 ; 4.45,66.2 5.25,66.2 ; 4.65,58.5 4.65,59.1 4.25,59.5 ; 5.25,64.7 4.55,64.7 4.55,62.8 ; 5.5,64.7 6,64.7 ; 5.5,66.2 6,66.2 ; 5.75,65.95 5.75,66.45 ; 8.85,65.45 8.85,62.9 8.25,62.9 7.85,62.5 ; 9.35,65.45 7.2,65.45 ; 4.25,59.5 4.95,60.2 4.25,60.9 ; 4.25,59.5 4.25,59.5 ; 4.25,60.9 4.95,61.6 4.55,62 4.55,62.8 ; 4.25,60.9 4.25,60.9 ; 4.55,62.8 5.35,62.8 5.75,63.2 6.45,62.5 ; 5.25,67.4 7.2,65.45 ; 5.25,67.4 5.25,63.5 7.2,65.45 ; 5.25,67.4 5.25,67.4 ; 5.25,67.4 5.25,67.4 ; 6.45,62.5 7.15,63.2 7.85,62.5 ; 6.45,62.5 6.45,62.5 ; 7.85,62.5 7.85,62.5
  text "Rf" at 7.05,63.6 h0.75
  text "Rg" at 2.55,61.3 h0.75
  text "I only give / Negative Feedback" at 5.65,59 h0.75
Board Outline:
  the board outline again, w0.254

## Text inside footprints (layer, text, board x,y; h text height)
J4: Top Overlay "2" at 45.199,24.671 h0.5 r180; Top Overlay "1" at 45.032,28.471 h0.5 r180; Top Overlay "4" at 39.825,24.659 h0.5 r180; Top Overlay "3" at 39.825,28.471 h0.5 r180; Mechanical 13 "2" at 45.199,24.671 h0.5 r180; Mechanical 13 "1" at 45.032,28.471 h0.5 r180; Mechanical 13 "4" at 39.825,24.659 h0.5 r180; Mechanical 13 "3" at 39.825,28.471 h0.5 r180
J5: Top Overlay "3" at 46.625,28.471 h0.5 r180; Top Overlay "4" at 46.625,24.659 h0.5 r180; Top Overlay "1" at 51.832,28.471 h0.5 r180; Top Overlay "2" at 51.999,24.671 h0.5 r180; Mechanical 13 "3" at 46.625,28.471 h0.5 r180; Mechanical 13 "4" at 46.625,24.659 h0.5 r180; Mechanical 13 "1" at 51.832,28.471 h0.5 r180; Mechanical 13 "2" at 51.999,24.671 h0.5 r180
U1: Top Overlay "*" at 61.4,21.6 h1.27; Mechanical 13 "*" at 62.957,20.458 h1.27
U2: Top Overlay "*" at 51.4,48.5 h1.27 r180; Mechanical 13 "*" at 49.93,49.744 h1.27 r180
U3: Top Overlay "*" at 61.488,42.255 h1.27; Mechanical 13 "*" at 62.945,41.013 h1.27
U4: Top Overlay "*" at 40.668,37.2 h1.27; Mechanical 13 "*" at 42.138,35.956 h1.27
U5: Top Overlay "*" at 19.802,-1.25 h1.27 r90; Mechanical 13 "*" at 20.844,0.166 h1.27 r90
U6: Top Overlay "*" at 19.802,42.329 h1.27 r90; Mechanical 13 "*" at 20.844,43.745 h1.27 r90
U7: Top Overlay "*" at 19.802,20.529 h1.27 r90; Mechanical 13 "*" at 20.844,21.945 h1.27 r90
U9: Mechanical 13 "*" at 55.121,46.067 h1.27; Bottom Overlay "*" at 56.607,42.131 h1.27